# Altium PCB Fastino_Ground_Isolator.PcbDoc (part 2 of 4)
Units mm, origin at the board's own origin, x right, y up, seen from the top; angles counter-clockwise.
Board outline 40 x 100 mm, 4 copper layers (Top Layer, Layer 1, Layer 2, Bottom Layer), stack 1.551 mm thick; 157 components, 67 nets, 468 pads, 321 vias.
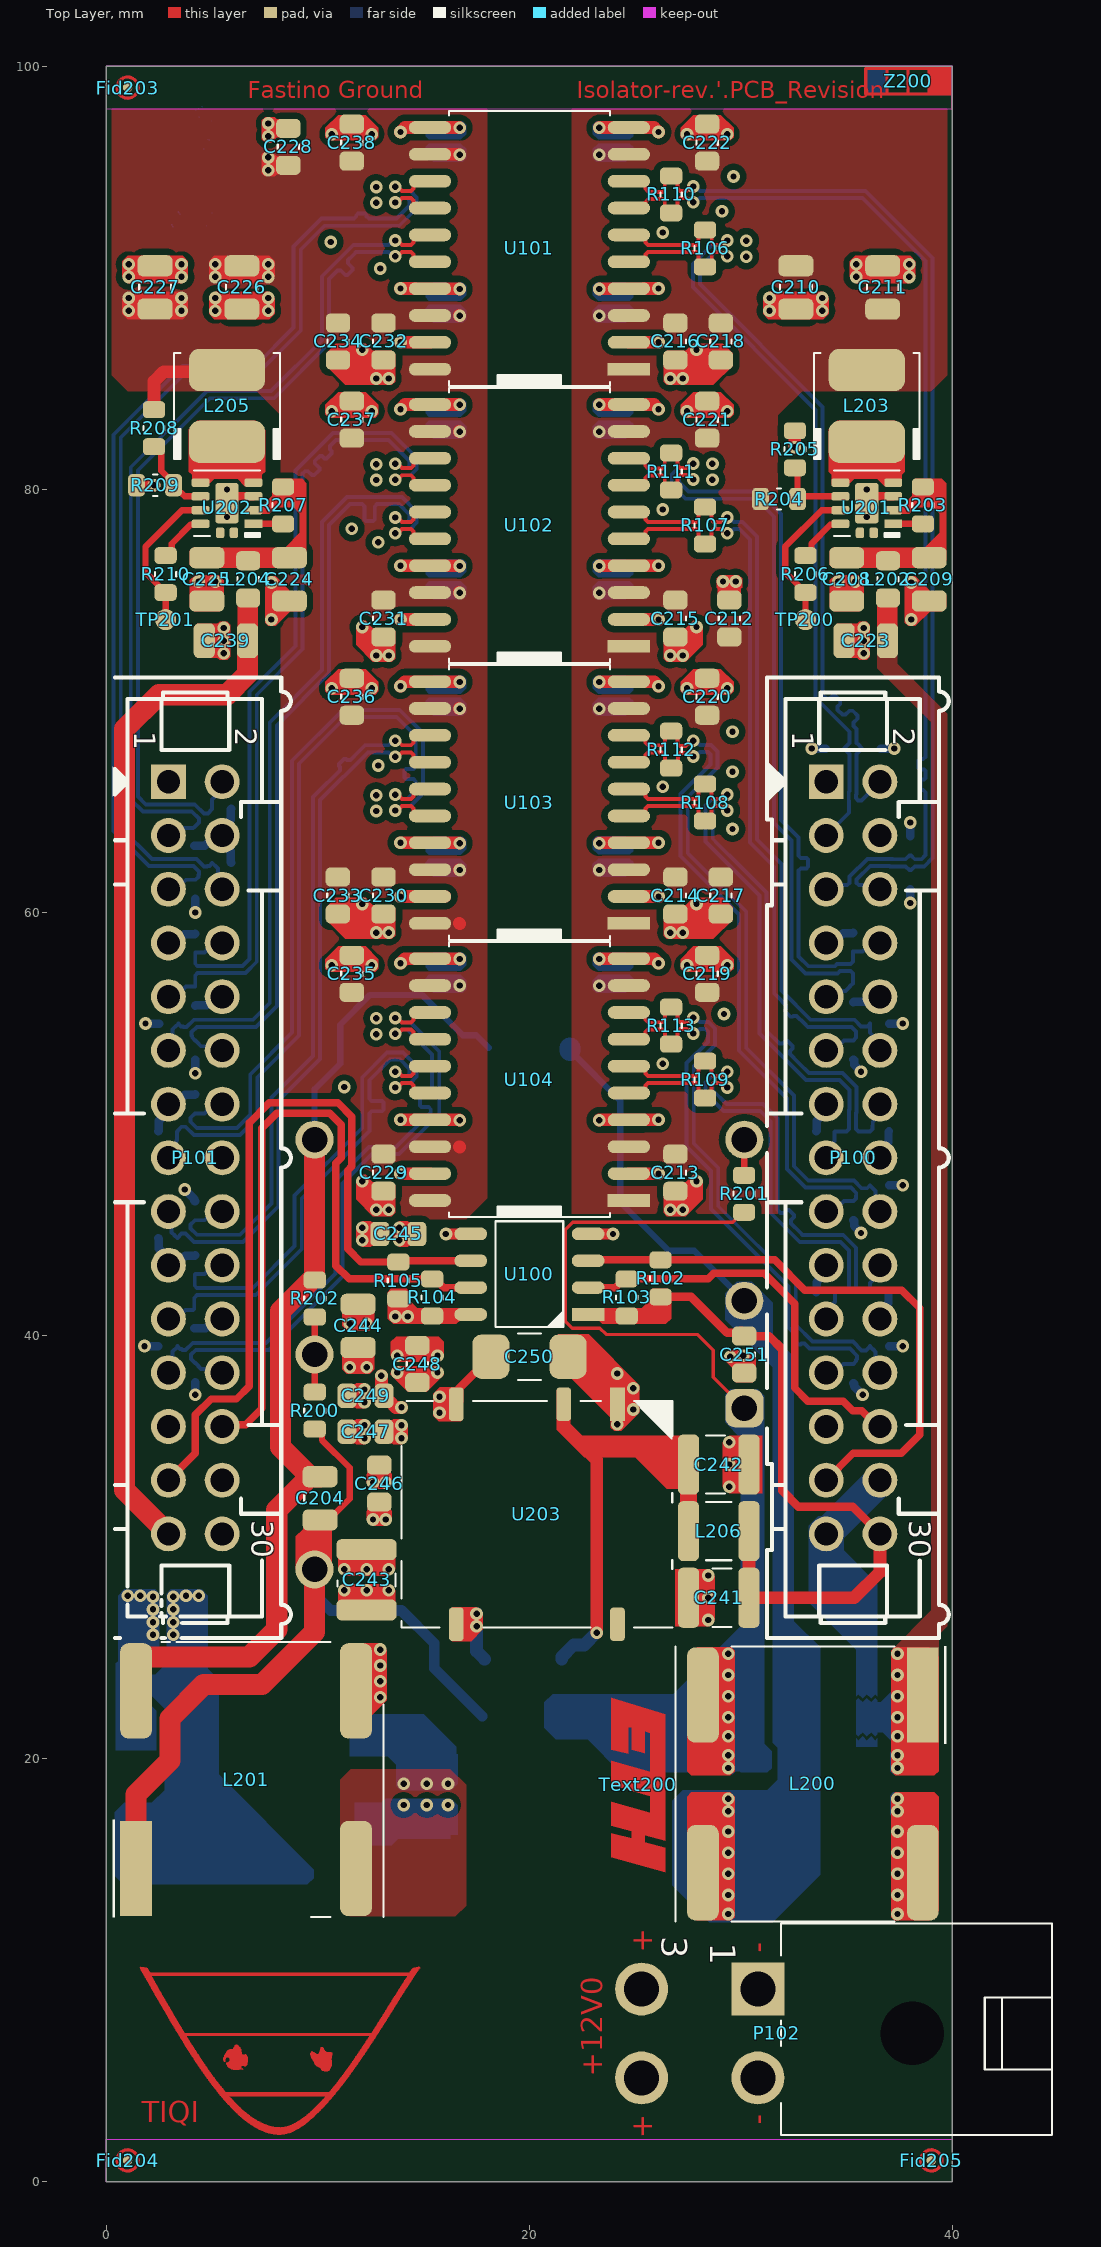
[diagram p0: Top Layer view]

## Part data (continued)
F200: library part Murata_BNX026H01L, "Filter - EMI - LC Filter - 50 kHz to 1 GHz - 20A", company part number=-, frequency range="50 kHz to 1 GHz", Manufacturer 1=Murata, Package="SMD 12.10 x 9.10mm", Resistance="430 uOhms", Supplier Part Number 1=2266-BNX026H01L-ND, temperature=-55..+125°C, Value Sort=0.000010000000000000000, Voltage=50V, Assembly House Supplier="Assembly House", Category=Filter, Category_sub=EMI_Filter_Circuits, Check#1 Symbol=PCLE_2026-03-30, Check#2 Attributes=PCLE_2026-03-30, Check#3 Footprint=PCLE_2026-03-30, Check#4 PCB Assembly=-, Check#5 Functional=-, circuit type="LC Filter", component_type="Filter - EMI", ComponentLifeCycle=New, ComponentLink1Description=Datasheet, ComponentLink1URL=https://www.mouser.com/datasheet/3/76/2/QNFH9101.pdf, Date - Creation="2026-03-25 11:04", date - modification="2026-03-25 11:04", db_component_name=Murata_BNX026H01L, Height=3.50mm, ID=1, imax=20A, Manufacturer Part Number 1=BNX026H01L, Mounting=SMD, product="EMI Network Filter Arrays", Qualification=AEC-Q200, Replacement Part Number=-, RoHS=Yes, series=BNX, Size / Dimension="12.10 x 9.10 x 3.50mm", Supplier 1=Digi-Key, tradename=EMIFIL, Type="Block Type Filter"
Fid200 Fid201 Fid202 Fid203 Fid204 Fid205: library part Fiducial_PCB, "Fiducial - PCB", company part number=-, Manufacturer 1=TBD, Package=SMD, temperature=-40..+85°C, Assembly House Supplier=Company, Category=PCB, Category_sub=Assembly, Check#1 Symbol=PCLE_2021-10-04, Check#2 Attributes=PCLE_2021-10-04, Check#3 Footprint=PCLE_2021-10-04, Check#4 PCB Assembly=PCLE_2021-10-04, Check#5 Functional=PCLE_2021-10-04, ComponentLifeCycle=New, Date - Creation=2021-10-04, date - modification=2021-10-04, db_component_name=Fiducial_PCB, Height=-, ID=1, Manufacturer Part Number 1=TBD, Mounting=SMD, Part Status=Active, pricing - digi-key=-, pricing - mouser=-, Replacement Part Number=-, RoHS=Yes, Size / Dimension=-, Supplier 1=-, Supplier 2=-, Supplier 3=-, Supplier 4=-, Supplier Part Number 1=-, Supplier Part Number 2=-, Supplier Part Number 3=-, Supplier Part Number 4=-, Type=-
L200 L201: library part Coilcraft_CR7915-ALD, "Filter - Common Mode - SMD - Nb Channels=1 - 1m12 - 2.6A - DCR=49.5mR", company part number=-, Manufacturer 1=Coilcraft, Manufacturer Part Number 1=CR7915-ALD, Package="SMD 13.00 x 13.00mm", Supplier Part Number 1=994-CR7915-ALD, temperature=-40..+125°C, test freq="4.9 MHz", Value Sort=0.001120000000000000000000, Assembly House Supplier="Assembly House", Category=Inductors_Chokes_and_Coils, Category_sub=Common_Mode_Chokes_Filters, Check#1 Symbol=PCLE_2026-04-13, Check#2 Attributes=PCLE_2026-03-31, Check#3 Footprint=PCLE_2026-04-13, Check#4 PCB Assembly=-, Check#5 Functional=-, component_type="Filter - Common Mode", ComponentLifeCycle=New, ComponentLink1Description=Datasheet, ComponentLink1URL=https://www.mouser.com/datasheet/3/995/1/sm_pl_filter.pdf, Date - Creation="2026-03-31 11:36", date - modification="2026-03-31 11:36", db_component_name=Coilcraft_CR7915-ALD, dcr=49.5mR, Height=5.60mm, ID=4, imax="2.6 A", impedance=3.1kR, Mounting=SMD, nb channels="1 Channel", product="AC Line Filters", Replacement Part Number=-, RoHS=Yes, shielding=Unshielded, Size / Dimension="13.00 x 13.00 x 5.60mm", Supplier 1=Mouser
L202 L204: library part Murata_LQM18PN3R3MGHD, "Inductor - Fixed - SMD - 3u30 - 1.05A - Shielded - ±20% - DCR=250mRMax - Ferrite - EIA-0603", Case Code - in=0603, Case Code - mm=1608, company part number=-, Manufacturer 1=Murata, Manufacturer Part Number 1=LQM18PN3R3MGHD, Package="EIA-0603 (1.60 x 0.80 x 0.95mm)", Supplier Part Number 1=490-15635-1-ND, temperature=-40..+85°C, test freq="1 MHz", Tolerance=±20%, Value Sort=0.000003300000000000000000, Application=Power, Assembly House Supplier="Assembly House", Category=Inductor, category#0="Inductors, Chokes and Coils", Category_sub=Fixed, Check#1 Symbol="___ OK ___", Check#2 Attributes=PCLE_2023-06-27, Check#3 Footprint=PCLE_2023-06-27, Check#4 PCB Assembly=PCLE_2023-12-06, Check#5 Functional="___ OK ___", component_type="Inductor - Fixed", ComponentLifeCycle=New, ComponentLink1Description=Datasheet, ComponentLink1URL=https://www.mouser.com/datasheet/2/281/1/JELF243B_0047-1699624.pdf, ComponentLink2Description="LQM18PNyyyyGHD Series Ref Sheet", ComponentLink2URL=https://search.murata.co.jp/Ceramy/image/img/P02/JELF243B-0047.pdf, ComponentLink3Description="Standard Land Pattern Dimensions", ComponentLink3URL=https://media.digikey.com/pdf/Data%20Sheets/Murata%20PDFs/LQx_Land-Patterns.pdf, Core Material=Ferrite, Core Type=Multilayer, Date - Creation="2023-03-09 10:28", date - modification="2023-03-09 10:28", db_component_name=Murata_LQM18PN3R3MGHD, dcr="250 mOhms", Diameter=-, Ftest="1 MHz", Height=0.95mm, ID=40, imax="1.05 A", ISat=200mA, Mounting=SMD, Part Status=Active, pricing - digi-key="1=0.28000 / 10=0.25000 / 25=0.21920 / 50=0.18780 / 100=0.17220 / 250=0.15656 / 500=0.14716 / 1000=0.11272 / 4000=0.10646 USD", pricing - mouser="1=0.287 / 10=0.193 / 100=0.161 / 500=0.152 / 1000=0.116 / 2000=0.111 / 4000=0.101 / 8000=0.098 / 24000=0.095 USD", product="Power Inductors - SMD", Qmin=-, Replacement Part Number=-, RoHS=Yes, series=LQM18, shielding=Shielded, Size / Dimension="1.60 x 0.80 x 0.95mm", SRF="30 MHz", Supplier 1=Digi-Key, Supplier 2=Digi-Key, Supplier 3=Digi-Key, Supplier 4=Mouser, Supplier Part Number 2=490-15635-6-ND, Supplier Part Number 3=490-15635-2-ND, Supplier Part Number 4=81-LQM18PN3R3MGHD, Termination=Standard, Type=Multilayer
L203 L205: library part Wuerth-Elektronik_74406042220, "Inductor - Fixed - SMD - 22u - 1A - Shielded - ±20% - DCR=339.2mR - Ferrite - (4.80x4.80x2.00mm)", company part number=-, Manufacturer 1="Wuerth Elektronik", Manufacturer Part Number 1=74406042220, Package="SMD (4.80 x 4.80 x 2.00mm)", Package#0="4.8 mm x 4.8 mm", Supplier Part Number 1=732-10812-1-ND, temperature=-40..+125°C, test freq="100 kHz", Tolerance=±20%, Value Sort=0.000022000000000000000, Application=Power, Assembly House Supplier="Assembly House", Category=Inductor, Category_sub=Fixed, Check#1 Symbol="___ OK ___", Check#2 Attributes=PCLE_2025-01-28, Check#3 Footprint=PCLE_2025-01-28, Check#4 PCB Assembly=-, Check#5 Functional="___ OK ___", component_type="Inductor - Fixed", ComponentLifeCycle=New, ComponentLink1Description="74406042220 Drawing", ComponentLink1URL=https://www.we-online.com/components/products/datasheet/74406042220.pdf, ComponentLink3Description="RoHS Cert", ComponentLink3URL=https://mm.digikey.com/Volume0/opasdata/d220001/medias/docus/744/Certificate_of_Compliance_ROHS.pdf, ComponentLink4Description="Mult Devices Label 22/Dec/2021", ComponentLink4URL=https://mm.digikey.com/Volume0/opasdata/d220001/medias/docus/4884/PCN_Label_20220317_22-Dec-2021.pdf, ComponentLink5Description="74406042220 Drawing", ComponentLink5URL=https://www.we-online.com/katalog/datasheet/74406042220.pdf, Core Material=Ferrite, Core Type=Wirewound, Date - Creation="2025-01-28 17:26", date - modification="2025-01-28 17:26", db_component_name=Wuerth-Elektronik_74406042220, dcr=339.2mR, DCR#0="339 mOhms", Diameter=-, Family="Fixed Inductors", Ftest="100 kHz", Height=2.00mm, ID=70, imax="1 A", ISat=680mA, Mounting=SMD, Part Status=Active, pricing - digi-key="1=0.90000 / 50=0.75060 / 100=0.57060 / 1000=0.48150 USD", pricing - mouser="1=1.00 / 50=0.834 / 100=0.634 / 1000=0.535 / 2000=0.534 USD", product="Power Inductors - SMD", Qmin=-, Replacement Part Number=-, RoHS=Yes, series=WE-LQFS, shielding=Shielded, Size / Dimension="4.80 x 4.80 x 2.00mm", SRF="30 MHz", Supplier 1=Digi-Key, Supplier 2=Digi-Key, Supplier 3=Digi-Key, Supplier 4=Mouser, Supplier Part Number 2=732-10812-6-ND, Supplier Part Number 3=732-10812-2-ND, Supplier Part Number 4=710-74406042220, Termination=Standard, Type="Drum Core, Wirewound"
L206: library part TDK_BCL322515RT-470M-D, "Inductor - Fixed - SMD - 47u - 670mA - Shielded - ±20% - DCR=1.4RMax - Ferrite - EIA-1210 (3.20 x 2.50 x 1.50mm)", Case Code - in=1210, Case Code - mm=3225, company part number=-, Manufacturer 1=TDK, Manufacturer Part Number 1=BCL322515RT-470M-D, Package="EIA-1210 (3.20 x 2.50 x 1.50mm)", Ratings=AEC-Q200, Supplier Part Number 1=445-BCL322515RT-470M-DCT-ND, temperature=-55..+155°C, test freq="1 MHz", Tolerance=±20%, Value Sort=0.000047000000000000000, Application=Automotive, Assembly House Supplier="Assembly House", Category=Inductor, category#0="Inductors, Chokes and Coils", Category_sub=Fixed, Check#1 Symbol="___ OK ___", Check#2 Attributes=PCLE_2024-10-10, Check#3 Footprint=PCLE_2024-10-10, Check#4 PCB Assembly=PCLE_2024-11-06, Check#5 Functional="___ OK ___", component_type="Inductor - Fixed", ComponentLifeCycle=New, ComponentLink1Description="BCL322515RT-D Type Datasheet", ComponentLink1URL=https://product.tdk.com/system/files/dam/doc/product/inductor/inductor/smd/catalog/inductor_automotive_power_bcl322515rt-d_en.pdf, Core Material=Ferrite, core material#0=Metal, Core Type=Wirewound, Date - Creation="2024-10-07 19:27", date - modification="2024-10-07 19:27", db_component_name=TDK_BCL322515RT-470M-D, dcr=1.4RMax, DCR#0="1.4 Ohms", Diameter=-, Family="Fixed Inductors", Ftest="1 MHz", Height=1.50mm, ID=66, imax="670 mA", ISat=570mA, Mounting=SMD, Part Status=Active, pricing - digi-key="1=1.54000 / 10=1.31300 / 25=1.21040 / 50=1.08160 / 100=0.90120 / 250=0.87552 / 500=0.82400 / 1000=0.77250 / 2000=0.77250 USD", pricing - mouser="1=1.52 / 10=1.08 / 100=0.872 / 500=0.804 / 1000=0.754 / 2000=0.747 / 4000=0.676 / 10000=0.654 USD", product="Power Inductors - SMD", Qmin=-, Qualification=AEC-Q200, Replacement Part Number=-, RoHS=Yes, series=BCL, shielding=Shielded, Size / Dimension="3.20 x 2.50 x 1.50mm", SRF=-, Supplier 1=Digi-Key, Supplier 2=Digi-Key, Supplier 3=Digi-Key, Supplier 4=Mouser, Supplier Part Number 2=445-BCL322515RT-470M-DDKR-ND, Supplier Part Number 3=445-BCL322515RT-470M-DTR-ND, Supplier Part Number 4=810-BCL322515RT470MD, Termination=Standard, Type="Drum Core, Wirewound"
P100 P101: library part 3M_N2530-6002RB, "Connector - SMD - Nb.Pos=30 Position - Nb.Rows=2 Row - Pitch=2.54mm - Imax=1.75A", company part number=-, Manufacturer 1=3M, Package=SMD, Supplier Part Number 1=MHC30K-ND, Assembly House Supplier="Assembly House", Category=Connectors_Interconnects, Check#1 Symbol=PCLE_2026-03-17, Check#2 Attributes=PCLE_2026-03-17, Check#3 Footprint=PCLE_2026-03-17, Check#4 PCB Assembly=-, Check#5 Functional=-, component_type=Connector, ComponentLifeCycle=New, ComponentLink1Description=Datasheet, ComponentLink1URL=https://multimedia.3m.com/mws/media/330367O/3m-four-wall-header-2500-series-ts-0770.pdf, Connector Type=Header, Date - Creation="2026-03-17 16:35", date - modification="2026-03-17 16:35", db_component_name=3M_N2530-6002RB, ID=30, imax=1.75A, Manufacturer Part Number 1=N2530-6002RB, Mounting=SMD, Number of Positions=30, Number of Rows=2, pitch=2.54mm, Replacement Part Number=-, RoHS=Yes, Row Spacing=2.54mm, Size / Dimension=-, Supplier 1=Digi-Key, Supplier 2=Digi-Key, Supplier 3=Digi-Key, Supplier 4=Mouser, Supplier Part Number 2=MHC30K-ND, Supplier Part Number 3=MHC30K-ND, Supplier Part Number 4=517-N2530-6002RB
P102: library part Molex_0039300040, "Connector - THT - Mini-Fit - Male - Nb.Pos=4 - Nb.Rows=2 - Pitch=4.20mm - Imax=13A", company part number=-, Flammability Rating="UL 94 V-0", Housing Colour=Natural, Manufacturer 1=Molex, Package=THT, Supplier Part Number 1=WM21352-ND, temperature=-40..+105°C, Voltage=600V, Application="Wire-to-Board, Power", Assembly House Supplier="Assembly House", Category=Headers_and_Wire_Housings, Category_sub=Headers_and_Wire_Housings, Check#1 Symbol=PCLE_2026-03-30, Check#2 Attributes=PCLE_2026-03-25, Check#3 Footprint=PCLE_2026-03-30, Check#4 PCB Assembly=-, Check#5 Functional=-, component_type=Connector, ComponentLifeCycle=New, ComponentLink1Description=Datasheet, ComponentLink1URL=https://www.molex.com/en-us/products/part-detail/39300040?display=pdf, Contact Gender="Pin (Male)", Contact Material=Brass, Contact Plating=Tin, Date - Creation="2026-03-25 09:42", date - modification="2026-03-25 09:42", db_component_name=Molex_0039300040, Housing Material=Nylon, ID=2, imax=13A, Manufacturer Part Number 1=0039300040, Mounting=THT, Mounting Angle=RA, Number of Positions="4 Position", Number of Rows="2 Row", pitch=4.20mm, product="Headers & Wire Housings", Replacement Part Number=-, RoHS=Yes, Row Spacing="4.2 mm", series=5569, Size / Dimension=-, Supplier 1=Digi-Key, Supplier 2=Digi-Key, Supplier 3=Digi-Key, Supplier 4=Mouser, Supplier Part Number 2=WM21352-ND, Supplier Part Number 3=WM21352-ND, Supplier Part Number 4=538-39-30-0040, tradename="Mini-Fit Jr.", Type=Power
R100 R101: library part Panasonic_ERJ-3GEY0R00V, "Resistor - SMD - 0R - Jumper - 100mW - Thick Film - EIA-0603", Case Code - in=0603, Case Code - mm=1608, company part number=-, Manufacturer 1=Panasonic, Manufacturer Part Number 1=ERJ-3GEY0R00V, Package="EIA-0603 (1.60 x 0.80 x 0.55mm)", Power=100mW, Supplier Part Number 1=P0.0GCT-ND, temperature=-55..+155°C, Tolerance=Jumper, Value Sort=0, Application="Automotive Grade", Assembly House Supplier="Assembly House", Category=Resistor, Category_sub=Chip, Check#1 Symbol=PCLE_2021-06-25, Check#2 Attributes=PCLE_2021-06-25, Check#3 Footprint=PCLE_2021-06-25, Check#4 PCB Assembly="___ OK ___", Check#5 Functional="___ OK ___", ComponentLifeCycle=New, ComponentLink1Description=Datasheet, ComponentLink1URL=https://www.mouser.com/datasheet/2/315/AOA0000C301-1488782.pdf, ComponentLink2Description="ERJ series label chg 14/MAY/2020", ComponentLink2URL=http://media.digikey.com/pdf/PCNs/Panasonic/PCN.PG24.05.14.2020.pdf, Composition="Thick Film", Date - Creation="2021-03-27 10:34", date - modification="2021-04-06 21:38", db_component_name=Panasonic_ERJ-3GEY0R00V, features="Automotive AEC-Q200", Height=0.55mm, ID=3, Mounting=SMD, Nb Terminations=2, Part Status=Active, pricing - digi-key="1=0.09000 / 10=0.02700 / 25=0.01920 / 50=0.01480 / 100=0.01100 / 250=0.00836 / 500=0.00670 / 1000=0.00493 / 5000=0.00353 USD", pricing - mouser="1=0.101 / 10=0.017 / 100=0.008 / 1000=0.006 / 5000=0.004 USD", Qualification=AEC-Q200, RoHS=Yes, series=ERJ-3G, Size / Dimension="1.60 x 0.80 x 0.55mm", Supplier 1=Digi-Key, Supplier 2=Digi-Key, Supplier 3=Digi-Key, Supplier 4=Mouser, Supplier Part Number 2=P0.0GDKR-ND, Supplier Part Number 3=P0.0GTR-ND, Supplier Part Number 4=667-ERJ-3GEY0R00V, Technology="Thick Film", Voltage=-
R102 R103 R104 R105 R205 R209: library part Panasonic_ERJ-3EKF4751V, "Resistor - SMD - 4k75 - ±1% - 100 PPM / C - 100mW - 1.60x0.80mm", Case Code - in=0603, Case Code - mm=1608, company part number=-, Manufacturer 1=Panasonic, Manufacturer Part Number 1=ERJ-3EKF4751V, Package="SMD 1.60 x 0.80mm", Power=100mW, Supplier Part Number 1=P4.75KHCT-ND, temperature=-55..+155°C, Temperature Coefficient="100 PPM / C", Tolerance=±1%, Value Sort=4750.00, Voltage=75V, Application="Automotive Grade", Assembly House Supplier="Assembly House", Category=Resistor, Category_sub=Thick_Film, Check#1 Symbol="___ OK ___", Check#2 Attributes=PCLE_2026-03-30, Check#3 Footprint="___ OK ___", Check#4 PCB Assembly="___ OK ___", Check#5 Functional="___ OK ___", component_type=Thick_Film, ComponentLifeCycle=New, ComponentLink1Description=Datasheet, ComponentLink1URL=https://industrial.panasonic.com/cdbs/www-data/pdf/RDA0000/AOA0000C304.pdf, Date - Creation="2026-03-30 09:24", date - modification="2026-03-30 09:24", db_component_name=Panasonic_ERJ-3EKF4751V, Height=0.45mm, ID=174, Mounting=SMD, Qualification=AEC-Q200, Replacement Part Number=-, RoHS="RoHS Compliant By Exemption", series=ERJ-xE, Size / Dimension="1.60 x 0.80 x 0.45mm", Supplier 1=Digi-Key, Supplier 2=Digi-Key, Supplier 3=Digi-Key, Supplier 4=Mouser, Supplier Part Number 2=P4.75KHDKR-ND, Supplier Part Number 3=P4.75KHTR-ND, Supplier Part Number 4=667-ERJ-3EKF4751V, Technology="Thick Film"
R106 R107 R108 R109 R110 R111 R112 R113: library part Panasonic_ERJ-3EKF1000V, "Resistor - SMD - 100R - ±1% - ±100ppm/°C - 100mW - Thick Film - EIA-0603", Case Code - in=0603, Case Code - mm=1608, company part number=-, Manufacturer 1=Panasonic, Manufacturer Part Number 1=ERJ-3EKF1000V, Package="EIA-0603 (1.60 x 0.80 x 0.55mm)", Power=100mW, Supplier Part Number 1=P100HCT-ND, temperature=-55..+155°C, Temperature Coefficient=±100ppm/°C, Tolerance=±1%, Value Sort=100, Voltage=75V, Application="Automotive Grade", Assembly House Supplier="Assembly House", Category=Resistor, Category_sub=Chip, Check#1 Symbol=PCLE_2021-06-25, Check#2 Attributes=PCLE_2021-06-25, Check#3 Footprint=PCLE_2021-06-25, Check#4 PCB Assembly="___ OK ___", Check#5 Functional="___ OK ___", ComponentLifeCycle=New, ComponentLink1Description=Datasheet, ComponentLink1URL=https://www.mouser.com/datasheet/2/315/AOA0000C304-1149620.pdf, ComponentLink2Description="ERJ Series, Precision Resistor Datasheet", ComponentLink2URL=https://industrial.panasonic.com/cdbs/www-data/pdf/RDA0000/AOA0000C304.pdf, ComponentLink3Description="Power Resistors Quick Guide", ComponentLink3URL=https://industrial.panasonic.com/cdbs/www-data/pdf/RDM0000/DMM0000COL7.pdf, ComponentLink4Description="ERJ series label chg 14/MAY/2020", ComponentLink4URL=http://media.digikey.com/pdf/PCNs/Panasonic/PCN.PG24.05.14.2020.pdf, Composition="Thick Film", Date - Creation="2021-03-27 10:54", date - modification="2021-04-06 22:08", db_component_name=Panasonic_ERJ-3EKF1000V, features="Automotive AEC-Q200", Height=0.55mm, ID=12, Mounting=SMD, Nb Terminations=2, Part Status=Active, pricing - digi-key="1=0.09000 / 10=0.03400 / 100=0.01390 / 1000=0.00623 / 2500=0.00541 / 5000=0.00447 USD", pricing - mouser="1=0.101 / 10=0.032 / 100=0.013 / 1000=0.006 USD", Qualification=AEC-Q200, Replacement Part Number=-, RoHS=Yes, series=ERJ-3EK, Size / Dimension="1.60 x 0.80 x 0.55mm", Supplier 1=Digi-Key, Supplier 2=Digi-Key, Supplier 3=Digi-Key, Supplier 4=Mouser, Supplier Part Number 2=P100HDKR-ND, Supplier Part Number 3=P100HTR-ND, Supplier Part Number 4=667-ERJ-3EKF1000V, Technology="Thick Film"